# Altium PCB PCB2.PcbDoc
Units mil, origin at the board's own origin, x right, y up, seen from the top; angles counter-clockwise.
Board outline 1210 x 2600 mil, 2 copper layers (Top Layer, Bottom Layer); 23 components, 21 nets, 112 pads, 0 vias.
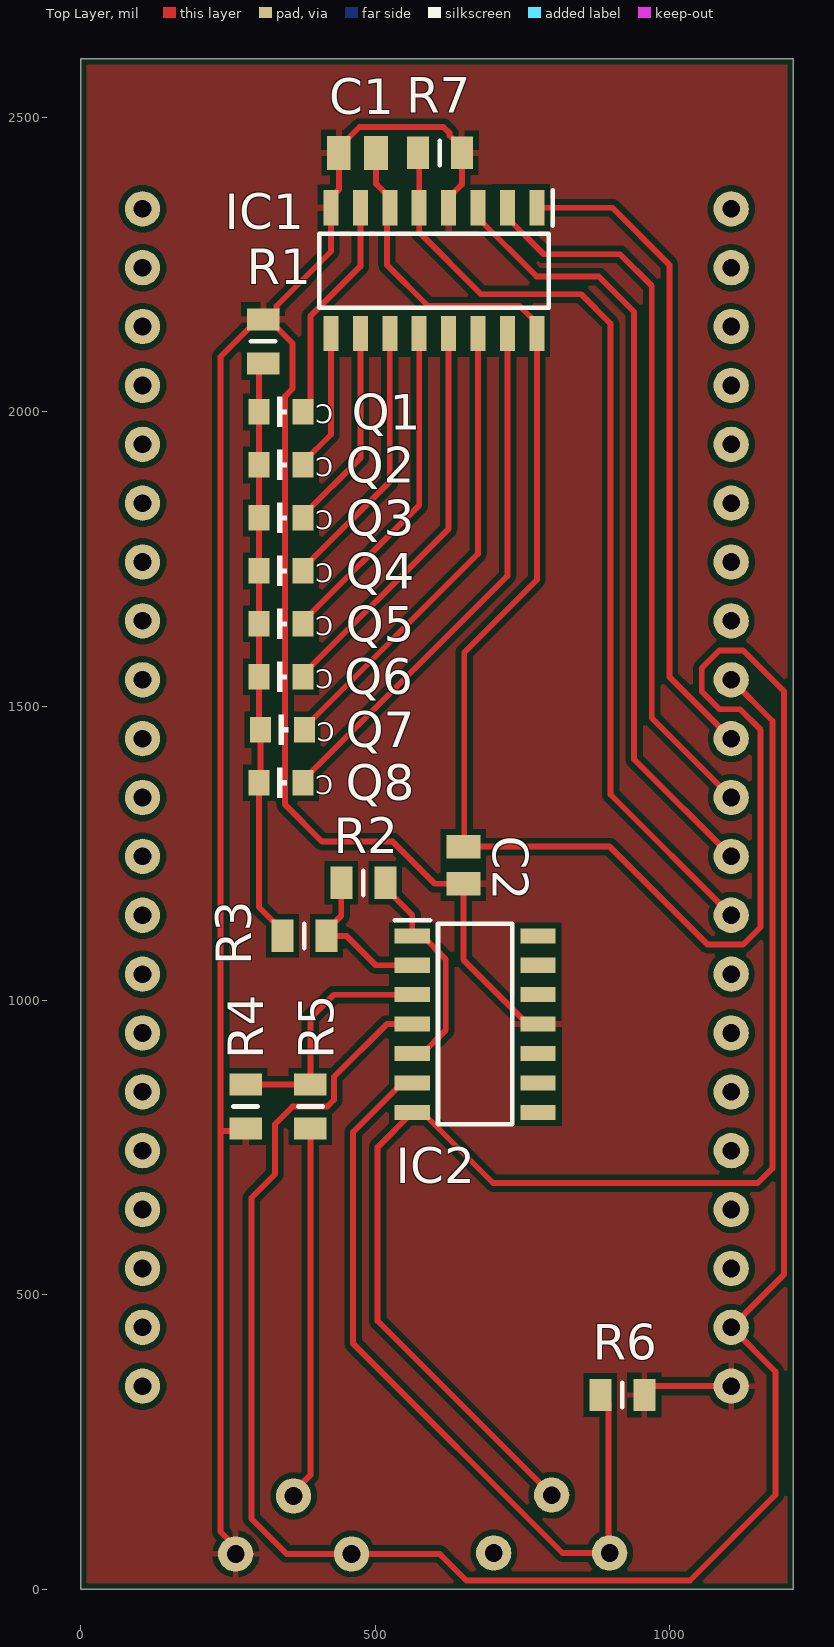
[diagram p0: Top Layer view]
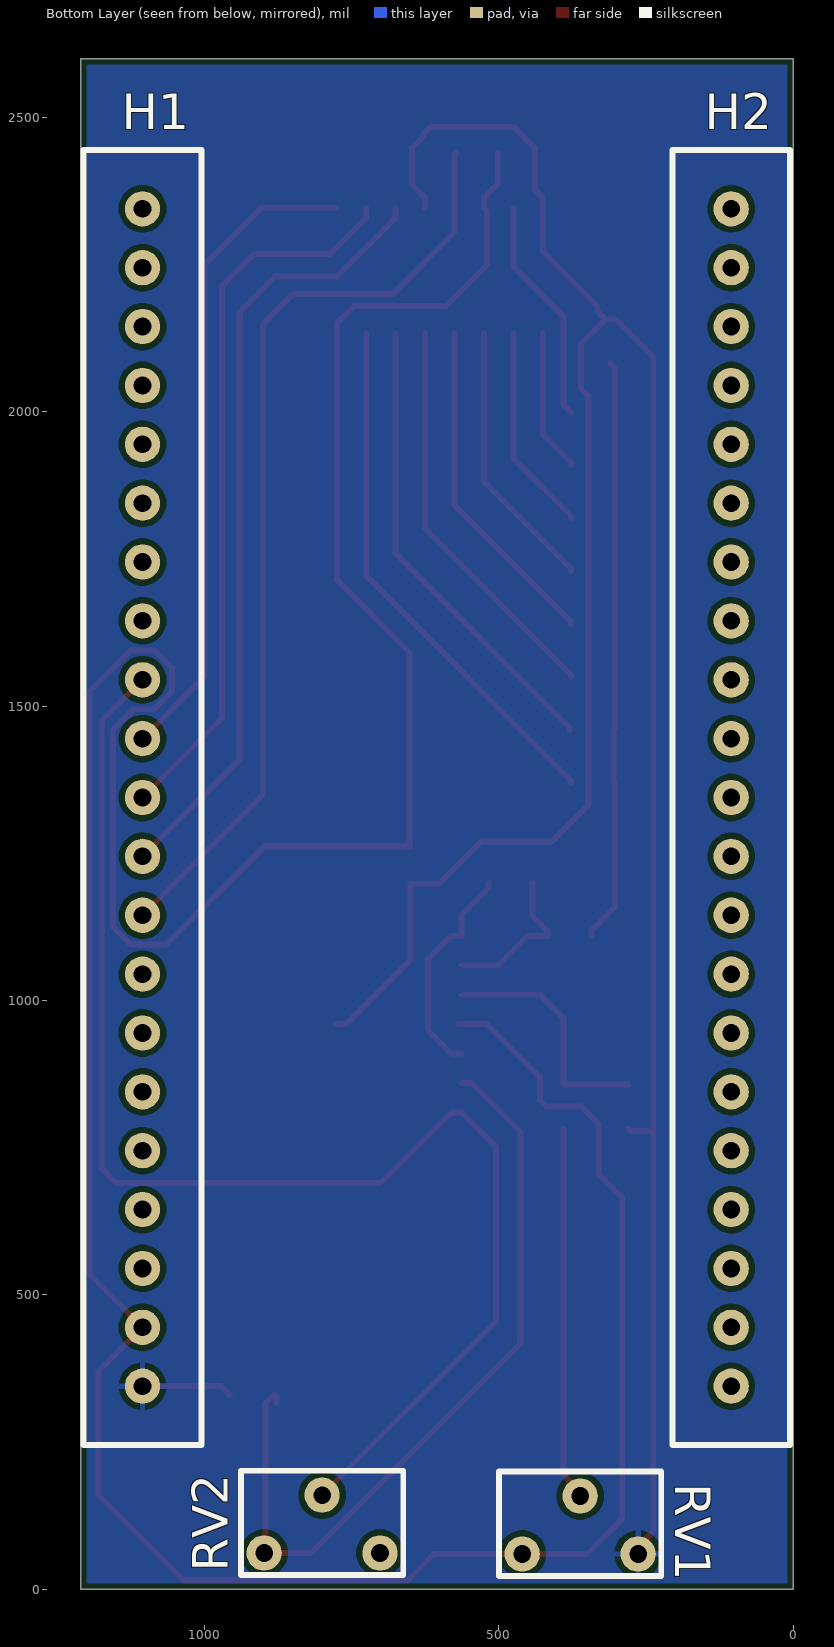
[diagram p1: Bottom Layer view, seen from below]
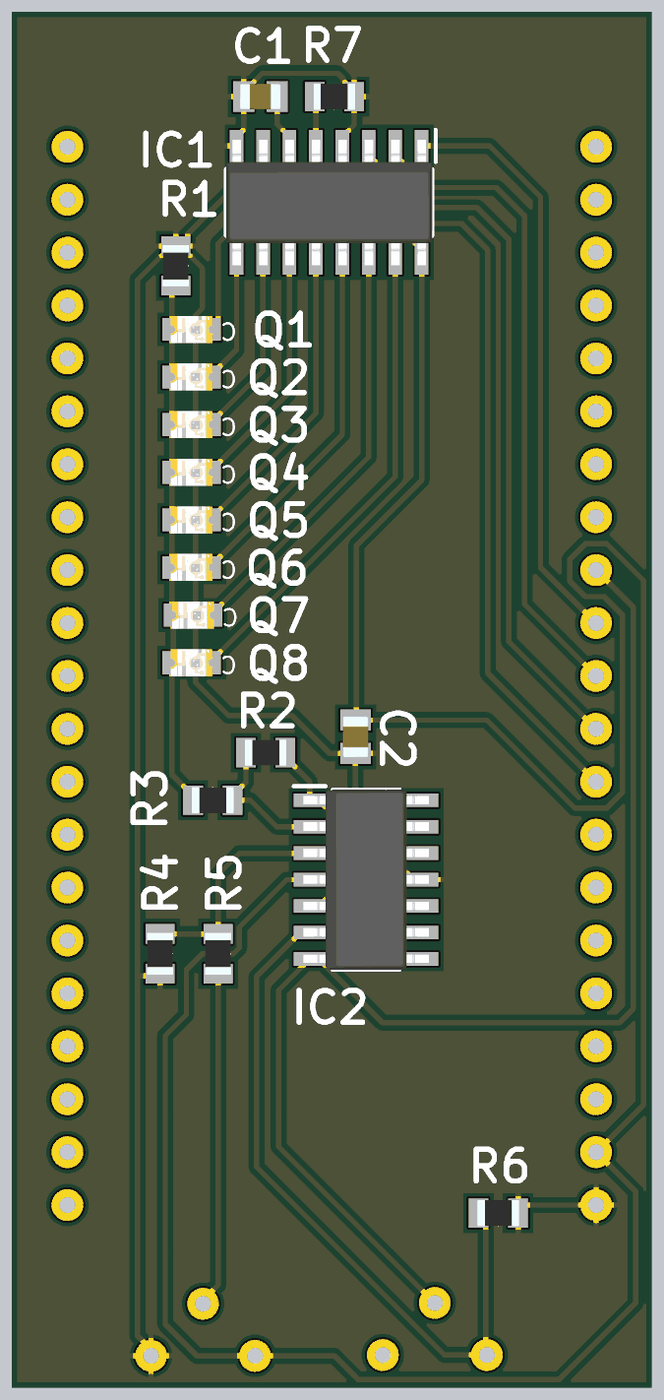
[diagram p2: 3D render of the assembled board from above, using the file's embedded part models]

## Layer stack, top to bottom
Top Solder: solder mask 0.4, Solder Resist, Dk 3.5
Top Layer: signal copper 1.4
Dielectric 1: dielectric 12.6, FR-4, Dk 4.8
Bottom Layer: signal copper 1.4
Bottom Solder: solder mask 0.4, Solder Resist, Dk 3.5

## Board outline
0,0 1210,0 1210,2600 0,2600

## Design rules (kind name [scope] priority, off if disabled: settings)
Clearance [All] p1: gap=10 ignorepadtopadclearanceinfootprint=FALSE except(0: Arc-Hole Track-Hole SMDPad-Hole THPad-Hole Via-Hole Fill-Hole Poly-Hole Region-Hole Text-Hole; 7.5: Arc-SMDPad Arc-THPad Track-SMDPad Track-THPad SMDPad-SMDPad SMDPad-THPad THPad-THPad)
PolygonConnect [All] p1: connectstyle=Relief reliefconductorwidth=10 reliefentries=4 polygonreliefangle="90 Angle" airgapwidth=10
RoutingVias [All] p1: holewidth=28 width=50 viastyle="Through Hole" minholewidth=28 minwidth=50 maxholewidth=28 maxwidth=50
SolderMaskExpansion [All] p1: expansion=4 istentingtop=FALSE
Width [All] p1: maxlimit=10 minlimit=10 preferedwidth=10
30 further rules are at their usual default settings.

## Components (designator, comment, footprint, x,y, rotation, side; value= is the part's Value field where it differs from the comment)
C1 "C-0,1µF-smd" C-0,1µF-smd 470,2440 r0 top
C2 "C-0,1µF-smd" C-0,1µF-smd 650,1230 r270 top
H1 "Header 21" "Header 21" 1105,2345 r180 bottom
H2 "Header 21" "Header 21" 105,2345 r180 bottom
IC1 "demultiplexer" demultiplexer 600,2240 r270 top
IC2 "opamp" SOIC127P600X175-14N 670,960 r0 top
Q1 "400-1100nm, 1mA, 130deg" WL-STCW_0805 340,2000 r180 top
Q2 "400-1100nm, 1mA, 130deg" WL-STCW_0805 340,1910 r180 top
Q3 "400-1100nm, 1mA, 130deg" WL-STCW_0805 340,1820 r180 top
Q4 "400-1100nm, 1mA, 130deg" WL-STCW_0805 340,1730 r180 top
Q5 "400-1100nm, 1mA, 130deg" WL-STCW_0805 340,1640 r180 top
Q6 "400-1100nm, 1mA, 130deg" WL-STCW_0805 340,1550 r180 top
Q7 "400-1100nm, 1mA, 130deg" WL-STCW_0805 342.6,1460 r180 top
Q8 "400-1100nm, 1mA, 130deg" WL-STCW_0805 340,1370 r180 top
R1 "R-1K-smd" R-1K-smd 310,2120 r270 top
R2 "R-1K-smd" R-1K-smd 480,1200 r0 top
R3 "R-1K-smd" R-1K-smd 380,1110 r0 top
R4 "R-1K-smd" R-1K-smd 280,820 r270 top
R5 "R-1K-smd" R-1K-smd 390,820 r90 top
R6 "R-1K-smd" R-1K-smd 920,330 r0 top
R7 "R-1K-smd" R-1K-smd 610,2440 r0 top
RV1 "Potentiometer" Potentiometer 361.57,109.21 r90 bottom
RV2 "Potentiometer" Potentiometer 800,110.79 r90 bottom

## Footprints (in the part's own frame and the unit in brackets; to place one, negate y for a bottom-side part, rotate by r counter-clockwise, add the part's x,y. Pads: shape width x height; smd on the part's side, far side on the other; paste and mask are expansions set on the pad)
C-0,1µF-smd [mm]
  rect 1.02x1.47 smd: 1(-0.8,0) 2(0.8,0)
  body extent -1,-0.63 1,0.63, height 0.88
demultiplexer [mm]
  rect 1.525x0.65 smd: 1(-2.712,4.445) 2(-2.712,3.175) 3(-2.712,1.905) 4(-2.712,0.635) 5(-2.712,-0.635) 6(-2.712,-1.905) 7(-2.712,-3.175) 8(-2.712,-4.445) 9(2.712,-4.445) 10(2.712,-3.175) 11(2.712,-1.905) 12(2.712,-0.635) 13(2.712,0.635) 14(2.712,1.905) 15(2.712,3.175) 16(2.712,4.445)
  silkscreen extent -3.48,-4.95 1.6,5.12, body extent -3.01,-4.94 3.01,4.96, height 1.75
"Header 21" [mil]
  round 60 hole 30: 1(0,0) 2(0,-100) 3(0,-200) 4(0,-300) 5(0,-400) 6(0,-500) 7(0,-600) 8(0,-700) 9(0,-800) 10(0,-900) 11(0,-1000) 12(0,-1100) 13(0,-1200) 14(0,-1300) 15(0,-1400) 16(0,-1500) 17(0,-1600) 18(0,-1700) 19(0,-1800) 20(0,-1900) 21(0,-2000)
  silkscreen extent -100,-2100 100,100
Potentiometer [mil] "PT10LH01-104A2020-S"
  round 60 hole 30: 1(-49.21,98.43) 2(-49.21,-98.43) 3(49.21,0)
  silkscreen extent -87,-138 91,138
R-1K-smd [mm]
  rect 0.95x1.4 smd: 1(-0.95,0) 2(0.95,0)
  silkscreen extent 0,-0.53 0,0.53, body extent -1,-0.63 1,0.63, height 0.6
SOIC127P600X175-14N [mm]
  rect 1.525x0.65 smd: 1(-2.712,3.81) 2(-2.712,2.54) 3(-2.712,1.27) 4(-2.712,0) 5(-2.712,-1.27) 6(-2.712,-2.54) 7(-2.712,-3.81) 8(2.712,-3.81) 9(2.712,-2.54) 10(2.712,-1.27) 11(2.712,0) 12(2.712,1.27) 13(2.712,2.54) 14(2.712,3.81)
  silkscreen extent -3.47,-4.33 1.6,4.48, body extent -3.01,-4.32 3.01,4.34, height 1.75
WL-STCW_0805 [mm] "SMT Phototransistor Chip Waterclear, body 2x1.3mm"
  rect 0.9x1.1 smd: 1(-0.95,0) 2(0.95,0)
  silkscreen extent -0.25,-0.65 0.15,0.65, body extent -1,-0.65 1,0.65, height 0.8

## Part data
C1 C2: "Capacitor", Manufacturer_Name=Kemet, Manufacturer_Part_Number=C0805C104K5RAC7411, Mouser2 Part Number=80-C0805C104K5RACLR, Datasheet Link=https://componentsearchengine.com//C0805C104K5RAC7411.pdf, Height=0.88mm, Mouser2 Price/Stock=https://www.mouser.com/Search/Refine.aspx?Keyword=80-C0805C104K5RACLR
IC1: "Integrated Circuit", Manufacturer_Name="Texas Instruments", Manufacturer_Part_Number=CD74HC237M, Mouser2 Part Number=595-CD74HC237M, Datasheet Link=http://www.ti.com/lit/ds/symlink/cd74hc237.pdf, Height=1.75mm, Mouser2 Price/Stock=https://www.mouser.com/Search/Refine.aspx?Keyword=595-CD74HC237M
IC2: "Integrated Circuit", Manufacturer_Name="Texas Instruments", Manufacturer_Part_Number=LM2902MTX/NOPB, Mouser2 Part Number=926-LM2902MTX/NOPB, Datasheet Link=http://www.ti.com/lit/gpn/lm2902-n, Height=1.2mm, Mouser2 Price/Stock=https://www.mouser.com/Search/Refine.aspx?Keyword=926-LM2902MTX%2FNOPB
Q1 Q2 Q3 Q4 Q5 Q6 Q7 Q8: library part 1540801NBA300, "WL-STCW SMT Phototransistor Chip Waterclear, size 0805, 400-1100nm, 1mA, 130deg", Collector Current min.=0.1mA, Collector Current typ.=1mA, Collector-Emitter Dark Current max.=100nA, Operating Temperature="-40 to +85degC", Chip Technology=Si, ComponentLink1Description=Manufacturer, ComponentLink1URL=http://www.we-online.de, ComponentLink2Description=Datasheet, ComponentLink2URL=https://www.we-online.com/catalog/datasheet/1540801NBA300.pdf, Manufacturer Part Number=1540801NBA300, Mounting Technology=SMT, Packaging="Tape and Reel", Published Date="March 2020", Publisher="Wurth Elektronik", Range of Spectral Bandwidth max.=1100nm, Range of Spectral Bandwidth min.=400nm, Size=0805, Viewing Angle=130deg, Wavelength of Peak Sensitivity typ.=940nm
R1 R2 R3 R4 R5 R6 R7: "Resistor", Manufacturer_Name="YAGEO (PHYCOMP)", Manufacturer_Part_Number=RC0805FR-131KL, Datasheet Link=https://datasheet.datasheetarchive.com/originals/distributors/Datasheets_SAMA/902f9e387b938f871d31120f5fc1d65e.pdf, Height=0.6mm
RV1 RV2: "PT10LH01-104A2020-S"

## Nets (pads, with @x,y where several pads share a name; then routed paths per layer and width w, separated by ;. In a path a pad name is that pad's centre, name@x,y a point inside that pad or via, vN(x,y) a via of type N, cw(c..) or ccw(c..) an arc to the next point about the centre after c; other vN are vias at no path point)
+5: C1.2 C2.1 H1.20 IC1.6 IC1.16 IC2.4 RV1.1 | length 6152.8
  Top Layer w10: C1.2 501.5,2387.5 525,2364 IC1.6 520,2341.77 520,2250 590,2180 745.45,2180 775,2150.45 IC1.16 775,1715 651.5,1591.5 C2.1@651.5,1261.5 ; IC2.4@568.26,960 520,960 430.06,870.06 430.06,833.52 430,833.46 430,831.07 418.93,820 360,820 330,790 330,705.1 290,665.11 290,120 350,60 RV1.1 610,60 655,15 1035,15 1180,160 1180,370 H1.20 1195,535 1195,1525 1125,1595 1085,1595 1055,1565 1055,1525 1085,1495 1120,1495 1155,1460 1155,1125 1125,1095 1065,1095 898.5,1261.5 C2.1@651.5,1261.5 ; C2.1 C2.1@651.5,1261.5
GND: C1.1 C2.2 H1.21 IC1.4 IC1.8 IC2.11 R1.1 R4.2 R6.2 R7.2 RV1.2 | length 4560.4
  Top Layer w10: 237.44,777.44 238.3,778.3 275.7,778.3 R4.2 ; RV1.2 263.15,72.22 237.44,97.93 237.44,761.17 237.44,765.16 237.44,778.3 237.44,2093.7 301.14,2157.4 R1.1 R1.1@318.86,2157.4 ; IC1.4 625,2364 647.4,2386.4 R7.2 647.4,2448.86 626.63,2469.63 626.63,2473.37 616.06,2483.94 473.58,2483.94 438.5,2448.86 C1.1 438.5,2377.5 425,2364 IC1.8 425,2272.4 332.56,2179.96 332.56,2171.1 R1.1@318.86,2157.4 ; IC2.11 759.55,960 650,1069.55 C2.2 601.5,1198.5 530,1270 410,1270 347.19,1332.82 347.19,2026.83 360,2039.65 360,2116.26 R1.1@318.86,2157.4 ; R6.2 957.4,331.3 971.1,345 H1.21
  Bottom Layer w10: H1.21 H1.21@1115,345
NetH1_9: H1.9 IC2.7 RV2.3 | length 2327.7
  Top Layer w10: RV2.3 504.33,455.67 504.33,751.1 IC2.7 580.45,810 700.45,690 1150,690 1175,715 1175,1475 H1.9
NetH1_10: H1.10 IC1.1 | length 1113.6
  Top Layer w10: IC1.1 903.23,2346.77 1000,2250 1000,1550 H1.10
NetH1_11: H1.11 IC1.2 | length 1235.1
  Top Layer w10: IC1.2 725,2329.55 786.6,2267.95 916.2,2267.95 970,2214.14 970,1480 H1.11
NetH1_12: H1.12 IC1.3 | length 1341.7
  Top Layer w10: IC1.3 675,2329.55 774.55,2230 880,2230 940,2170 940,1410 H1.12
NetH1_13: H1.13 IC1.5 R7.1 | length 1615.1
  Top Layer w10: R7.1 575,2437.6 IC1.5 575,2305 680,2200 850,2200 900,2150 900,1350 H1.13
NetIC1_7: IC1.7 Q1.1 | length 387.2
  Top Layer w10: Q1.1 390.12,2012.72 390.12,2162.37 475,2247.26 IC1.7
NetIC1_9: IC1.9 Q2.1 | length 242.9
  Top Layer w10: Q2.1 377.4,1913.94 425,1961.54 IC1.9
NetIC1_10: IC1.10 Q3.1 | length 353.7
  Top Layer w10: Q3.1 377.4,1823.94 475,1921.54 IC1.10
NetIC1_11: IC1.11 Q4.1 | length 464.4
  Top Layer w10: Q4.1 377.4,1733.94 525,1881.54 IC1.11
NetIC1_12: IC1.12 Q5.1 | length 575.1
  Top Layer w10: Q5.1 377.4,1643.94 575,1841.54 IC1.12
NetIC1_13: IC1.13 Q6.1 | length 685.8
  Top Layer w10: Q6.1 377.4,1553.94 625,1801.54 IC1.13
NetIC1_14: IC1.14 Q7.1 | length 795.4
  Top Layer w10: Q7.1 380,1463.94 675,1758.94 IC1.14
NetIC1_15: IC1.15 Q8.1 | length 907.2
  Top Layer w10: Q8.1 377.4,1373.94 725,1721.54 IC1.15
NetIC2_1: IC2.1 IC2.5 R2.2 | length 376.2
  Top Layer w10: R2.2 517.4,1191.14 563.23,1145.32 IC2.1 580.45,1110 620,1070.45 620,949.55 580.45,910 IC2.5
NetIC2_2: IC2.2 R2.1 R3.2 | length 267
  Top Layer w10: R2.1 442.6,1144.06 417.4,1118.86 R3.2 451.1,1110 501.11,1060 IC2.2
NetIC2_3: IC2.3 R4.1 R5.2 | length 412.4
  Top Layer w10: R4.1 R5.2 390,970 430,1010 IC2.3
NetIC2_6: IC2.6 R6.1 RV2.1 | length 1371.7
  Top Layer w10: IC2.6 546,860 462.8,776.79 462.8,417.2 818.43,61.57 RV2.1 896.3,63.7 896.3,316.3 R6.1 877.4,330 R6.1@877.4,315.94
NetQ1_2: Q1.2 Q2.2 Q3.2 Q4.2 Q5.2 Q6.2 Q7.2 Q8.2 R1.2 R3.1 | length 994.4
  Top Layer w10: R1.2 302.6,2075.2 Q1.2 Q2.2 Q3.2 Q4.2 Q5.2 Q6.2 302.6,1462.6 Q7.2 305.2,1372.6 Q8.2 302.6,1158.86 342.6,1118.86 R3.1
NetR5_1: R5.1 RV1.3 | length 635.9
  Top Layer w10: RV1.3 361.57,165.21 390,193.64 R5.1
pads on no net: H1.1 H1.2 H1.3 H1.4 H1.5 H1.6 H1.7 H1.8 H1.14 H1.15 H1.16 H1.17 H1.18 H1.19 H2.1 H2.2 H2.3 H2.4 H2.5 H2.6 H2.7 H2.8 H2.9 H2.10 H2.11 H2.12 H2.13 H2.14 H2.15 H2.16 H2.17 H2.18 H2.19 H2.20 H2.21 IC2.8 IC2.9 IC2.10 IC2.12 IC2.13 IC2.14 RV2.2

## Polygon pours and split planes (outlines as drawn)
GND on Top Layer "NONET_L-01_P-001" (solid, pour order 0): 10,2590 1200,2590 1200,10 10,10
GND on Bottom Layer "NONET_L-01_P-001" (solid, pour order 1): 10,2590 1200,2590 1200,10 10,10

## Silkscreen, mask and mechanical layers (free items; w line width, h text height)
board Outline:
  the board outline again, w11.81

## Text inside footprints (layer, text, board x,y; h text height)
Q1: Top Overlay "C" at 428.58,2011.81 h31.5 r180
Q2: Top Overlay "C" at 428.58,1921.81 h31.5 r180
Q3: Top Overlay "C" at 428.58,1831.81 h31.5 r180
Q4: Top Overlay "C" at 428.58,1741.81 h31.5 r180
Q5: Top Overlay "C" at 428.58,1651.81 h31.5 r180
Q6: Top Overlay "C" at 428.58,1561.81 h31.5 r180
Q7: Top Overlay "C" at 431.18,1471.81 h31.5 r180
Q8: Top Overlay "C" at 428.58,1381.81 h31.5 r180